# EAGLE board medi_dense_4_cpx (EAGLE 6.0)

Size 26.42 x 19.81 mm. Coordinates in mm from the lower left corner, seen from the top.
Outline: 0,0 0,19.81 26.42,19.81 26.42,0 0,0
Copper layers (1*16): Top 0.035mm / dielectric 1.5mm / Bottom 0.035mm
Design rules: minimum track width 10mil, minimum drill 24mil, track to track 8mil, track to pad 8mil, pad to pad 8mil, via to via 8mil, smd to smd 8mil, copper to edge 40mil, drill to drill 8mil, minimum pad ring 10mil, minimum via ring 8mil, stop-mask expansion 4mil, vias tented up to drill 0mil, thermal gap 10mil
Holes 3.2 mm at 6.6,6.6 6.6,13.21 19.81,6.6 19.81,13.21

## Footprints (pad centres in the part's own frame; a part is rotated, then mirrored left to right if it is on the bottom)
LED5MM = drill 0.813 octagon: A -1.27,0; K 1.27,0
1X01 = drill 1.016 octagon: 1 0,0

## Placement (x,y rotation side)
00  [LED5MM]  3.3,3.3 0 top
01  [LED5MM]  9.91,3.3 0 top
02  [LED5MM]  16.51,3.3 0 top
03  [LED5MM]  23.11,3.3 0 top
10  [LED5MM]  3.3,9.91 0 top
11  [LED5MM]  9.91,9.91 0 top
12  [LED5MM]  16.51,9.91 0 top
13  [LED5MM]  23.11,9.91 0 top
20  [LED5MM]  3.3,16.51 0 top
21  [LED5MM]  9.91,16.51 0 top
22  [LED5MM]  16.51,16.51 0 top
23  [LED5MM]  23.11,16.51 0 top
H0  [1X01]  9.4,6.6 0 top
H1  [1X01]  11.94,6.6 0 top
H2  [1X01]  14.48,6.6 0 top
H3  [1X01]  17.02,6.6 0 top

## Library data of the parts
00 01-03 10-13 20-23 = led
H0 H1-H3 = pinhead

## Nets
D: 00.A 03.K 11.A 13.K 22.A 23.K H3.1
S0: 00.K 01.A 02.A 03.A 10.K 20.K H0.1
S1: 01.K 10.A 11.K 12.A 13.A 21.K H1.1
S2: 02.K 12.K 20.A 21.A 22.K 23.A H2.1

## Tracks (layer width: path | path; a pad name or v marks a point on that pad's centre or on a via)
D  (6 unrouted)
S0  (6 unrouted)
S1  (6 unrouted)
S2  (6 unrouted)